# EAGLE board Fluorometer (EAGLE 9.6.2)
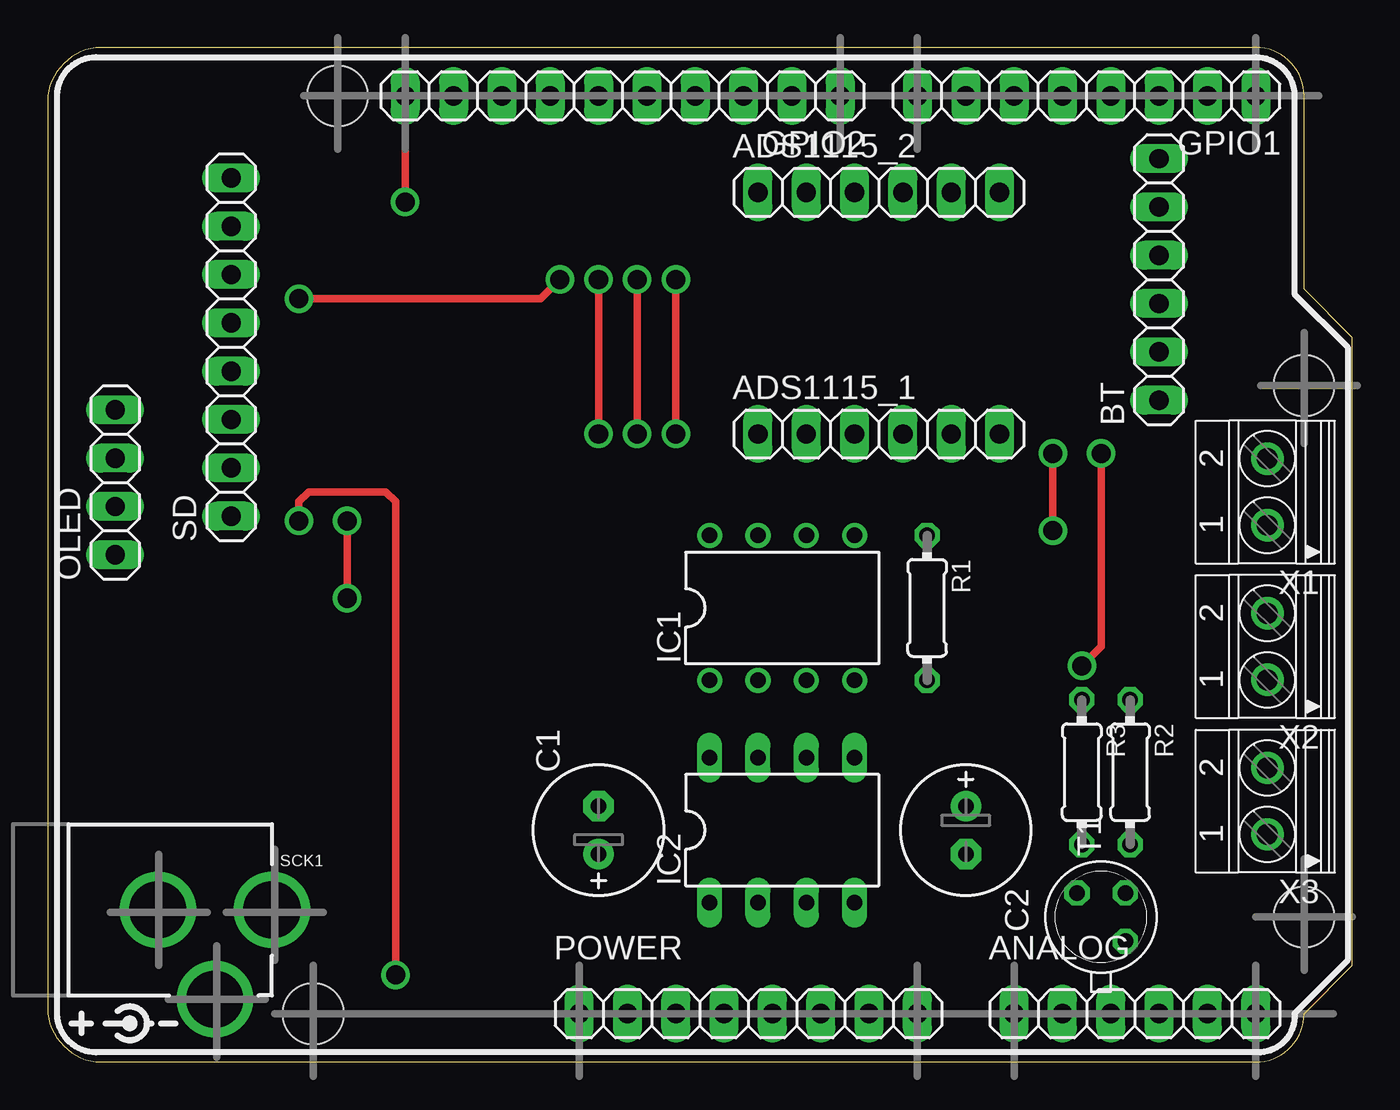
[diagram p0: board, top side]
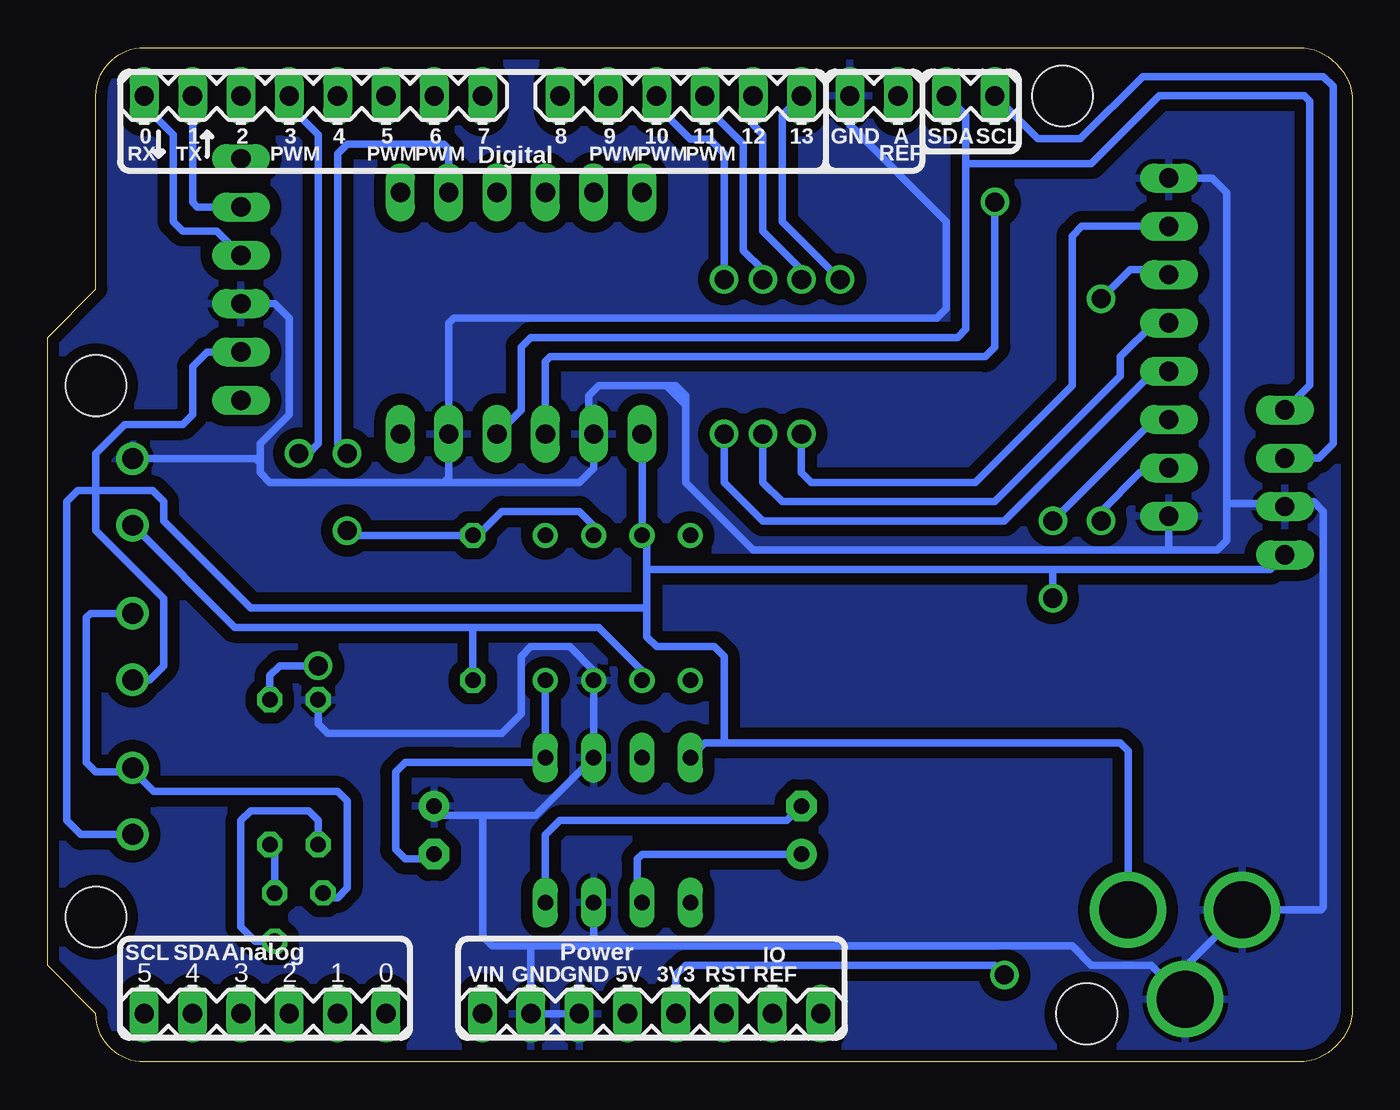
[diagram p1: board, bottom side, seen from below]

Size 68.58 x 53.34 mm. Coordinates in mm from the lower left corner, seen from the top.
Outline: 0,2.54 arc74 2.54,0 63.5,0 arc90 66.04,2.54 68.58,5.08 68.58,38.1 66.04,40.64 66.04,50.8 arc90 63.5,53.34 2.54,53.34 arc74 0,50.8 0,2.54
Copper layers (1*16): Top 0.035mm / dielectric 1.5mm / Bottom 0.035mm
Design rules "default *": minimum track width 10mil, minimum drill 18mil, track to track 10mil, track to pad 10mil, pad to pad 10mil, via to via 10mil, smd to smd 8mil, copper to edge 18mil, drill to drill 8mil, minimum pad ring 10mil, minimum via ring 8mil, stop-mask expansion 4mil, vias tented up to drill 25mil, thermal gap 10mil
Holes 3.2 mm at 66.04,35.56 66.04,7.62 15.24,50.8 13.97,2.54

## Footprints (pad centres in the part's own frame; a part is rotated, then mirrored left to right if it is on the bottom)
1X06 = drill 1.016 long: 1 -6.35,0; 2 -3.81,0; 3 -1.27,0; 4 1.27,0; 5 3.81,0; 6 6.35,0
E2,5-7 = drill 0.813 pad 1.6: + -1.27,0 | drill 0.813 pad 1.6 octagon: - 1.27,0
1X08 = drill 1.016 long: 1 -8.89,0; 2 -6.35,0; 3 -3.81,0; 4 -1.27,0; 5 1.27,0; 6 3.81,0; 7 6.35,0; 8 8.89,0
1X10 = drill 1.016 long: 1 -11.43,0; 2 -8.89,0; 3 -6.35,0; 4 -3.81,0; 5 -1.27,0; 6 1.27,0; 7 3.81,0; 8 6.35,0; 9 8.89,0; 10 11.43,0
DIL08 = drill 0.813 pad 1.27: 1 -3.81,-3.81; 2 -1.27,-3.81; 3 1.27,-3.81; 4 3.81,-3.81; 5 3.81,3.81; 6 1.27,3.81; 7 -1.27,3.81; 8 -3.81,3.81
DIL08' = drill 0.813 long: 1 -3.81,-3.81; 2 -1.27,-3.81; 3 1.27,-3.81; 4 3.81,-3.81; 5 3.81,3.81; 6 1.27,3.81; 7 -1.27,3.81; 8 -3.81,3.81
1X04 = drill 1.016 long: 1 -3.81,0; 2 -1.27,0; 3 1.27,0; 4 3.81,0
0204/7 = drill 0.813 octagon: 1 -3.81,0; 2 3.81,0
POWER_JACK_PTH = drill 2.997: GND 0,7.7; GNDBREAK 4.7,10.7; PWR 0,13.7
TO18 = drill 0.813 octagon: 1 -1.27,-1.27; 2 1.27,-1.27; 3 1.27,1.27
1751248 = drill 1.1 pad 1.7: 1 -1.75,-0.1; 2 1.75,-0.1

## Placement (x,y rotation side)
ADS1115_1  [1X06]  43.69,33.02 0 top
ADS1115_2  [1X06]  43.69,45.72 0 top
ANALOG  [1X06]  57.15,2.54 0 top
BT  [1X06]  58.42,41.15 90 top
C1  150uF  [E2,5-7]  28.96,12.19 90 top
C2  150uF  [E2,5-7]  48.26,12.19 270 top
GPIO1  [1X08]  54.61,50.8 180 top
GPIO2  [1X10]  30.23,50.8 180 top
IC1  TL081P  [DIL08]  38.61,23.88 0 top
IC2  MAX660  [DIL08']  38.61,12.19 0 top
OLED  [1X04]  3.56,30.48 90 top
POWER  [1X08]  36.83,2.54 0 top
R1  100k  [0204/7]  46.23,23.88 270 top
R2  273  [0204/7]  56.9,15.24 270 top
R3  4.7  [0204/7]  54.36,15.24 270 top
SCK1  DC_2_1MM  [POWER_JACK_PTH]  -1.91,8 270 top
SD  [1X08]  9.65,37.59 90 top
T1  2N2222  [TO18]  55.37,7.62 90 top
X1  1751248  [1751248]  64.01,29.97 90 top
X2  1751248  [1751248]  64.01,21.84 90 top
X3  1751248  [1751248]  64.01,13.72 90 top

## Library data of the parts
ADS1115_1 ADS1115_2 ANALOG BT GPIO1 GPIO2 OLED POWER SD = pinhead
C1 C2 = rcl; SPICEPREFIX: C
IC1 = linear
IC2 = maxim; MF: MAXIM; MPN: MAX660CPA; OC_FARNELL: 1187928; OC_NEWARK: 34C3964
R1-R3 = rcl; SPICEPREFIX: R
SCK1 = freetronics
T1 = transistor
X1-X3 = con-phoenix-350; OC_FARNELL: unknown; OC_NEWARK: unknown

## Nets
+3V3: POWER.4 SD.2
+5V: ADS1115_1.1 BT.2 IC1.7 IC2.8 OLED.1 SCK1.PWR SD.3 X2.1 X3.1
-5V: C2.- IC1.4 IC2.5
A4_SDA: ADS1115_1.4 GPIO2.9 OLED.4
A5_SCL: ADS1115_1.3 GPIO2.10 OLED.3
AIN0: ADS1115_2.5 IC1.6 R1.1
D0_TX: BT.4 GPIO1.1
D1_RX: BT.5 GPIO1.2
D3: GPIO1.4 R2.1
D10_CS: GPIO2.3 SD.4
D11_MOSI: GPIO2.4 SD.5
D12_MISO: GPIO2.5 SD.7
D13_SCK: GPIO2.6 SD.6
GND: ADS1115_1.2 ADS1115_1.5 BT.3 C2.+ GPIO2.7 IC1.3 IC2.3 IC2.6 OLED.2 POWER.6 POWER.7 R3.1 SCK1.GND SCK1.GNDBREAK SD.1 SD.8 X1.2
N$1: IC1.2 R1.2 X1.1
N$2: R2.2 T1.2
N$3: R3.2 T1.1
N$4: T1.3 X2.2 X3.2
N$5: C1.+ IC2.2
N$6: C1.- IC2.4

## Tracks (layer width: path | path; a pad name or v marks a point on that pad's centre or on a via)
+3V3  (via drill 1 pad 1.3)
  Top 0.406: v13.21,28.45 13.21,29.46 13.72,29.97 17.78,29.97 18.29,29.46 v18.29,4.57
  Bottom 0.406: SD.2 10.41,31.24 10.67,30.99 11.18,30.99 13.21,28.96 v13.21,28.45 | POWER.4 35.56,4.57 35.05,5.08 18.8,5.08 v18.29,4.57
+5V  (via drill 1 pad 1.3)
  Top 0.406: v15.75,28.45 v15.75,24.38
  Bottom 0.406: 37.08,25.91 37.08,27.43 IC1.7 ADS1115_1.1 | 37.08,25.91 37.08,23.88 | X3.1 66.83,11.97 67.56,12.7 67.56,29.46 66.99,30.04 66.04,30.04 | SCK1.PWR 11.79,16.37 12.19,16.76 33.02,16.76 | 66.04,30.04 66.04,32 64.52,33.53 61.47,33.53 60.96,34.04 60.96,36.58 60.2,37.34 BT.2 | SD.3 10.41,33.78 v15.75,28.45 | X2.1 63.22,20.09 62.48,20.83 62.48,24.38 66.04,27.94 66.04,30.04 | 66.04,30.04 63.06,30.04 62.48,29.46 62.48,28.45 57.91,23.88 37.08,23.88 | 37.08,23.88 37.08,22.35 36.58,21.84 33.53,21.84 33.02,21.34 33.02,16.76 | 33.02,16.76 34.04,16.76 IC2.8 | 3.61,26.62 OLED.1 4.32,25.91 15.75,25.91 | 15.75,25.91 37.08,25.91 | 15.75,25.91 v15.75,24.38
-5V
  Bottom 0.406: IC1.4 IC2.5 42.67,15.75 47.24,15.75 49.78,15.75 50.29,15.24 50.29,11.18 49.78,10.67 48.51,10.67 C2.-
A4_SDA
  Bottom 0.406: GPIO2.9 20.32,49.78 20.32,47.24 | 20.32,47.24 13.72,47.24 10.16,50.8 2.54,50.8 2.25,50.51 2.25,35.6 OLED.4 | 20.32,47.24 20.32,38.53 20.75,38.1 43.18,38.1 43.69,37.59 43.69,34.29 ADS1115_1.4
A5_SCL  (via drill 1 pad 1.3)
  Top 0.406: v18.8,45.21 GPIO2.10
  Bottom 0.406: GPIO2.10 16.54,48.54 14.3,48.54 11.03,51.82 1.52,51.82 1.02,51.31 1.02,32.51 1.78,31.75 OLED.3 | v18.8,45.21 18.8,37.59 19.3,37.08 42.16,37.08 42.42,36.83 ADS1115_1.3
AIN0  (via drill 1 pad 1.3)
  Top 0.406: v52.83,32 v52.83,27.94
  Bottom 0.406: v52.83,27.94 52.58,27.69 R1.1 45.97,27.69 44.7,28.96 40.64,28.96 39.88,28.19 IC1.6 | ADS1115_2.5 47.5,48.01 47.75,48.26 52.83,48.26 53.34,47.75 53.34,32.51 v52.83,32
D0_TX
  Bottom 0.406: GPIO1.1 63.5,50.29 61.98,48.77 61.98,44.2 61.47,43.69 59.69,43.69 BT.4
D1_RX
  Bottom 0.406: BT.5 60.71,44.96 60.96,45.21 GPIO1.2
D3  (via drill 1 pad 1.3)
  Top 0.406: v55.37,32 55.37,21.84 v54.36,20.83
  Bottom 0.406: GPIO1.4 55.88,50.29 54.36,48.77 54.36,32.51 54.86,32 v55.37,32 | v54.36,20.83 56.39,20.83 56.9,20.32 R2.1
D10_CS  (via drill 1 pad 1.3)
  Top 0.406: v33.02,41.15 v33.02,33.02
  Bottom 0.406: SD.4 10.67,36.32 10.67,36.07 18.29,28.45 30.99,28.45 33.02,30.48 v33.02,33.02 | GPIO2.3 36.58,49.78 36.07,49.78 34.8,48.51 33.78,48.51 33.02,47.75 v33.02,41.15
D11_MOSI  (via drill 1 pad 1.3)
  Top 0.406: v30.99,41.15 v30.99,33.02
  Bottom 0.406: v30.99,33.02 30.99,30.48 29.97,29.46 18.8,29.46 12.19,36.07 12.19,37.08 10.41,38.86 SD.5 | v30.99,41.15 30.99,41.66 32,42.67 32,48.26 34.04,50.29 GPIO2.4
D12_MISO  (via drill 1 pad 1.3)
  Top 0.406: v28.96,41.15 v28.96,33.02
  Bottom 0.406: GPIO2.5 31.5,49.28 30.99,48.77 30.99,43.69 29.97,42.67 28.96,41.66 v28.96,41.15 | v28.96,33.02 28.96,30.99 28.45,30.48 19.81,30.48 14.73,35.56 14.73,43.43 14.22,43.94 SD.7
D13_SCK  (via drill 1 pad 1.3)
  Top 0.406: v26.92,41.15 25.91,40.13 v13.21,40.13
  Bottom 0.406: v13.21,40.13 11.68,41.66 9.91,41.66 SD.6 | GPIO2.6 29.97,49.78 29.97,44.2 v26.92,41.15
GND
  Bottom 0.406: POWER.6 POWER.7 43.18,6.1 | 47.75,30.48 47.5,30.73 ADS1115_1.5 47.5,38.86 47.24,39.12 21.84,39.12 21.34,39.62 21.34,44.2 26.42,49.28 GPIO2.7 | 47.75,30.48 40.64,30.48 39.88,31.24 ADS1115_1.2 40.13,33.27 40.13,35.05 39.62,35.56 36.07,35.56 | 47.75,30.48 56.9,30.48 57.4,30.99 57.4,31.5 | BT.3 56.64,39.88 55.88,39.12 55.88,34.04 57.4,32.51 57.4,31.5 | 36.07,35.56 35.05,34.54 | 9.65,26.92 7.11,26.92 6.6,27.43 6.6,29.46 | 9.65,26.92 31.5,26.92 35.05,30.48 35.05,34.54 | SD.1 9.65,26.92 | SD.8 7.37,46.48 6.6,45.72 6.6,29.46 | R3.1 54.36,17.78 53.85,17.27 44.7,17.27 43.69,18.29 43.69,21.34 43.18,21.84 41.15,21.84 39.88,20.57 IC1.3 IC2.6 42.93,12.95 45.72,12.95 | 39.62,6.1 14.73,6.1 13.72,5.08 10.57,5.08 SCK1.GNDBREAK 8.79,5 SCK1.GND 1.65,8 1.52,8.13 1.52,28.96 2.03,29.46 3.3,29.46 3.41,29.36 | 39.62,6.1 43.18,6.1 | 43.18,6.1 45.21,6.1 45.72,6.6 45.72,12.95 | 39.62,6.1 39.88,6.35 IC2.3 | 6.6,29.46 6.5,29.36 3.41,29.36 | 35.05,34.54 35.05,35.05 35.56,35.56 36.07,35.56 | X1.2 57.63,31.72 57.4,31.5 | C2.+ 47.75,12.95 45.72,12.95 | 3.41,29.36 OLED.2
  pour Bottom (isolate 0.61): 0,52.83 68.07,52.83 68.07,1.02 67.06,0 1.02,0 0,1.02
N$1
  Bottom 0.406: 46.23,22.86 39.62,22.86 37.34,20.57 IC1.2 | 46.23,22.86 R1.2 | X1.1 58.75,22.86 46.23,22.86
N$2
  Bottom 0.406: R2.2 56.64,11.18 T1.2
N$3
  Bottom 0.406: R3.2 54.36,12.7 54.86,13.21 57.91,13.21 58.42,12.7 58.42,7.11 57.66,6.35 T1.1
N$4
  Bottom 0.406: X2.2 66.32,23.59 66.55,23.37 66.55,15.75 66.04,15.24 64.33,15.24 64.17,15.4 | 64.17,15.4 X3.2 64.11,15.34 | T1.3 53.85,8.64 53.34,8.64 52.83,9.14 52.83,13.72 53.34,14.22 62.99,14.22 64.11,15.34 | 64.11,15.34 64.17,15.4
N$5
  Bottom 0.406: C1.+ 37.34,10.92 37.59,10.67 37.59,8.64 IC2.2
N$6
  Bottom 0.406: IC2.4 42.42,11.94 41.66,12.7 29.72,12.7 C1.-

## Text on the board
bPlace: SCL | SDA | A | GND | 13 | 12 | 11 | 10 | 9 | 8 | 7 | 6 | 5 | 4 | 3 | 2 | 1 | 0 | REF | PWM | PWM | PWM | Digital | PWM | PWM | PWM | TX | RX | IO | Power | Analog | SDA | SCL | REF | RST | 3V3 | 5V | GND | GND | VIN | 0 | 1 | 2 | 3 | 4 | 5
tTest: GND | A+ | A3 | A2 | A1 | A0 | A- | RX | MISO | TX | SCK | GND | MOSI | 5V | CS | 5V | GND | SCL | SDA | ADDR | ALRT | SDA | +5V | SCL | GND | +3.3V | GND | GND | PHO | +5V | LED2 | +5V | Fluorimeter Shield / A.Courtay | LED1 | +5V | +5V